# EAGLE board NFC_Demo_Board (EAGLE 9.2.2)
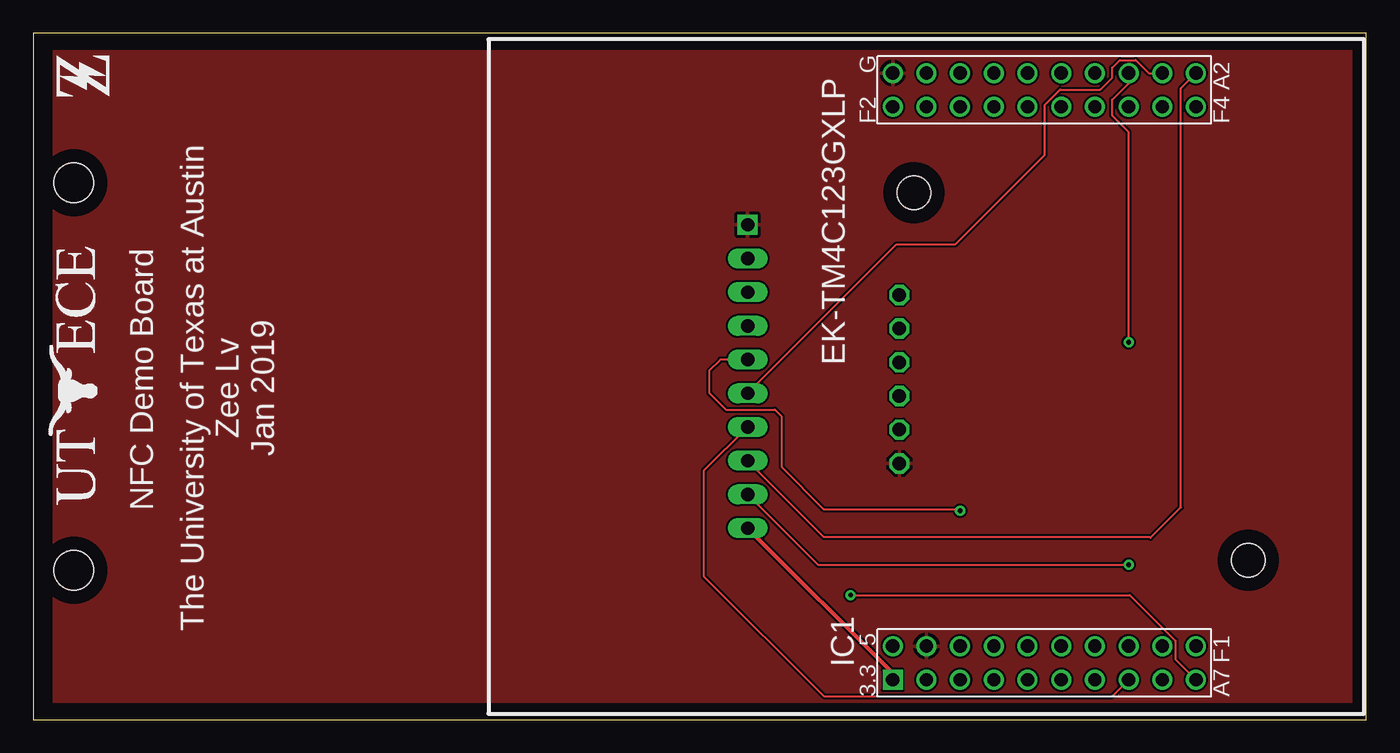
[diagram p0: board, top side]
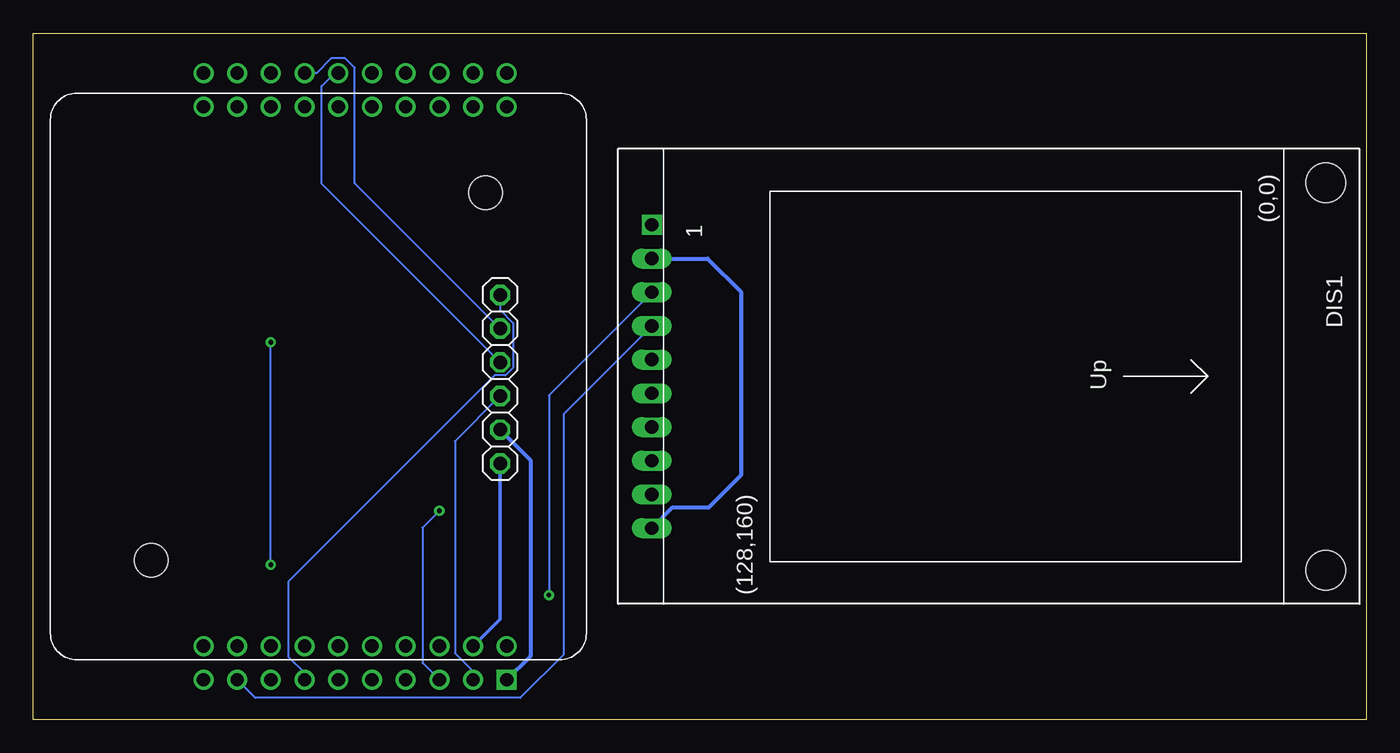
[diagram p1: board, bottom side, seen from below]

Size 100.5 x 51.74 mm. Coordinates in mm from the lower left corner, seen from the top.
Outline: 0,0 100.5,0 100.5,51.74 0,51.74 0,0
Copper layers (1*16): Top 0.035mm / dielectric 1.5mm / Bottom 0.035mm
Design rules "default": minimum track width 6mil, minimum drill 0.35mm, track to track 6mil, track to pad 6mil, pad to pad 6mil, via to via 6mil, smd to smd 6mil, copper to edge 40mil, drill to drill 6mil, minimum pad ring 10mil, minimum via ring 8mil, stop-mask expansion 4mil, vias tented up to drill 0mil, thermal gap 10mil

## Footprints (pad centres in the part's own frame; a part is rotated, then mirrored left to right if it is on the bottom)
ST7735 = drill 1 square: 1 -11.43,-30.48 | drill 1 long: 2 -8.89,-30.48; 3 -6.35,-30.48; 4 -3.81,-30.48; 5 -1.27,-30.48; 6 1.27,-30.48; 7 3.81,-30.48; 8 6.35,-30.48; 9 8.89,-30.48; 10 11.43,-30.48 | hole 3: -14.605,20.32; 14.605,20.32
TM4C123LAUNCHPAD = drill 1 square: 1 -22.86,12.7 | drill 1: 2 -22.86,10.16; 3 -22.86,7.62; 4 -22.86,5.08; 5 -22.86,2.54; 6 -22.86,0; 7 -22.86,-2.54; 8 -22.86,-5.08; 9 -22.86,-7.62; 10 -22.86,-10.16; 11 22.86,-10.16; 12 22.86,-7.62; 13 22.86,-5.08; 14 22.86,-2.54; 15 22.86,0; 16 22.86,2.54; 17 22.86,5.08; 18 22.86,7.62; 19 22.86,10.16; 20 22.86,12.7; 21 -20.32,12.7; 22 -20.32,10.16; 23 -20.32,7.62; 24 -20.32,5.08; 25 -20.32,2.54; 26 -20.32,0; 27 -20.32,-2.54; 28 -20.32,-5.08; 29 -20.32,-7.62; 30 -20.32,-10.16; 31 20.32,-10.16; 32 20.32,-7.62; 33 20.32,-5.08; 34 20.32,-2.54; 35 20.32,0; 36 20.32,2.54; 37 20.32,5.08; 38 20.32,7.62; 39 20.32,10.16; 40 20.32,12.7
ELECHOUSE_PN532_SPI = drill 1.016 octagon: GND 6.55,13.7; MISO -3.61,13.7; MOSI -1.07,13.7; SCK -6.14,13.7; SS 1.47,13.7; VCC 4.01,13.7 | hole 2.54: 13.85,-12.6; -13.85,12.6

## Placement (x,y rotation side)
DIS1  ST7735  [ST7735]  23.38,25.87 270 bottom
IC1  EK-TM4C123GXLP  [TM4C123LAUNCHPAD]  77.5,25.87 90 top
U$1  ELECHOUSE_PN532_SPI  [ELECHOUSE_PN532_SPI]  79,25.87 270 bottom
U$2  [LOGO_UT_ECE_20X4]  5.11,15.75 90 top
U$3  [LOGO_Z_3X4]  5.74,46.99 90 top

## Library data of the parts
DIS1 = UT_ECE; OC_FARNELL: unknown; OC_NEWARK: unknown
IC1 = UT_ECE
U$1-U$3 = Z

## Nets
3V3: DIS1.2 DIS1.10 IC1.1 U$1.VCC
5V: IC1.21
GND: DIS1.1 IC1.20 IC1.22 U$1.GND
SD_CS: DIS1.5 IC1.3
SSI0_MISO: DIS1.9 IC1.13
SSI0_MOSI: DIS1.7 IC1.8
SSI0_SCK: DIS1.8 IC1.11
SSI0_SS: DIS1.6 IC1.12
SSI2_MISO: IC1.14 U$1.MISO
SSI2_MOSI: IC1.15 U$1.MOSI
SSI2_SCK: IC1.7 U$1.SCK
SSI2_SS: IC1.2 U$1.SS
ST7735_DC: DIS1.4 IC1.9
ST7735_RESET: DIS1.3 IC1.10

## Tracks (layer width: path | path; a pad name or v marks a point on that pad's centre or on a via)
3V3
  Top 0.305: DIS1.10 64.8,3.5 IC1.1
  Bottom 0.305: U$1.VCC 63.01,19.57 63.01,4.8 IC1.1 | DIS1.10 52.3,16 49.56,16 47.15,18.42 47.15,32.26 49.65,34.76 DIS1.2
GND
  Bottom 0.254: U$1.GND 65.3,7.59 IC1.22
  pour Top: 1.5,50.37 1.5,1.37 99.5,1.37 99.5,50.37
SD_CS  (via drill 0.35)
  Top 0.152: DIS1.5 51.81,27.14 50.96,26.29 50.96,24.64 52.23,23.37 55.91,23.37 56.42,22.86 56.42,19.05 59.59,15.88 69.75,15.88 v69.88,15.75
  Bottom 0.152: v69.88,15.75 71.15,14.48 71.15,4.28 IC1.3
SSI0_MISO  (via drill 0.35)
  Top 0.152: v82.58,28.45 82.58,44.29 81.34,45.53 81.34,46.72 82.58,47.96 IC1.13 | v82.58,11.68 59.16,11.68 DIS1.9
  Bottom 0.152: v82.58,11.68 v82.58,28.45
SSI0_MOSI
  Top 0.152: IC1.8 81.34,1.77 59.6,1.77 50.55,10.82 50.55,18.54 50.55,18.75 DIS1.7
SSI0_SCK
  Top 0.152: IC1.11 86.52,47.59 86.52,16 84.23,13.72 84.16,13.79 59.59,13.79 DIS1.8
SSI0_SS
  Top 0.152: IC1.12 84.1,48.73 83.11,49.71 81.92,49.71 81.34,49.14 81.34,48.39 80.45,47.49 77.41,47.49 76.26,46.34 76.26,42.58 69.52,35.83 65.09,35.83 DIS1.6
SSI2_MISO
  Bottom 0.152: U$1.MISO 76.26,40.44 76.26,49.14 76.97,49.84 78.03,49.84 79.14,48.73 IC1.14
SSI2_MOSI
  Bottom 0.152: U$1.MOSI 78.77,40.41 78.77,47.75 77.79,48.73 IC1.15
SSI2_SCK
  Bottom 0.152: IC1.7 80.04,3.53 81.28,4.76 81.28,10.38 65.71,25.95 64.89,25.95 64.31,26.53 64.31,29.89 65.3,30.88 U$1.SCK
SSI2_SS
  Bottom 0.152: IC1.2 67.34,3.65 68.7,5.02 68.7,21 U$1.SS
ST7735_DC
  Bottom 0.152: IC1.9 83.76,1.65 63.78,1.65 60.48,4.95 60.48,23.06 DIS1.4
ST7735_RESET  (via drill 0.35)
  Top 0.152: IC1.10 86.1,4.57 86.1,5.96 82.66,9.4 v61.62,9.4
  Bottom 0.152: DIS1.3 61.62,24.46 v61.62,9.4

## Text on the board
tPlace: NFC Demo Board | The University of Texas at Austin / Zee Lv / Jan 2019